# EAGLE board ATMEGA328P.(20201123)brd (EAGLE 9.6.2)
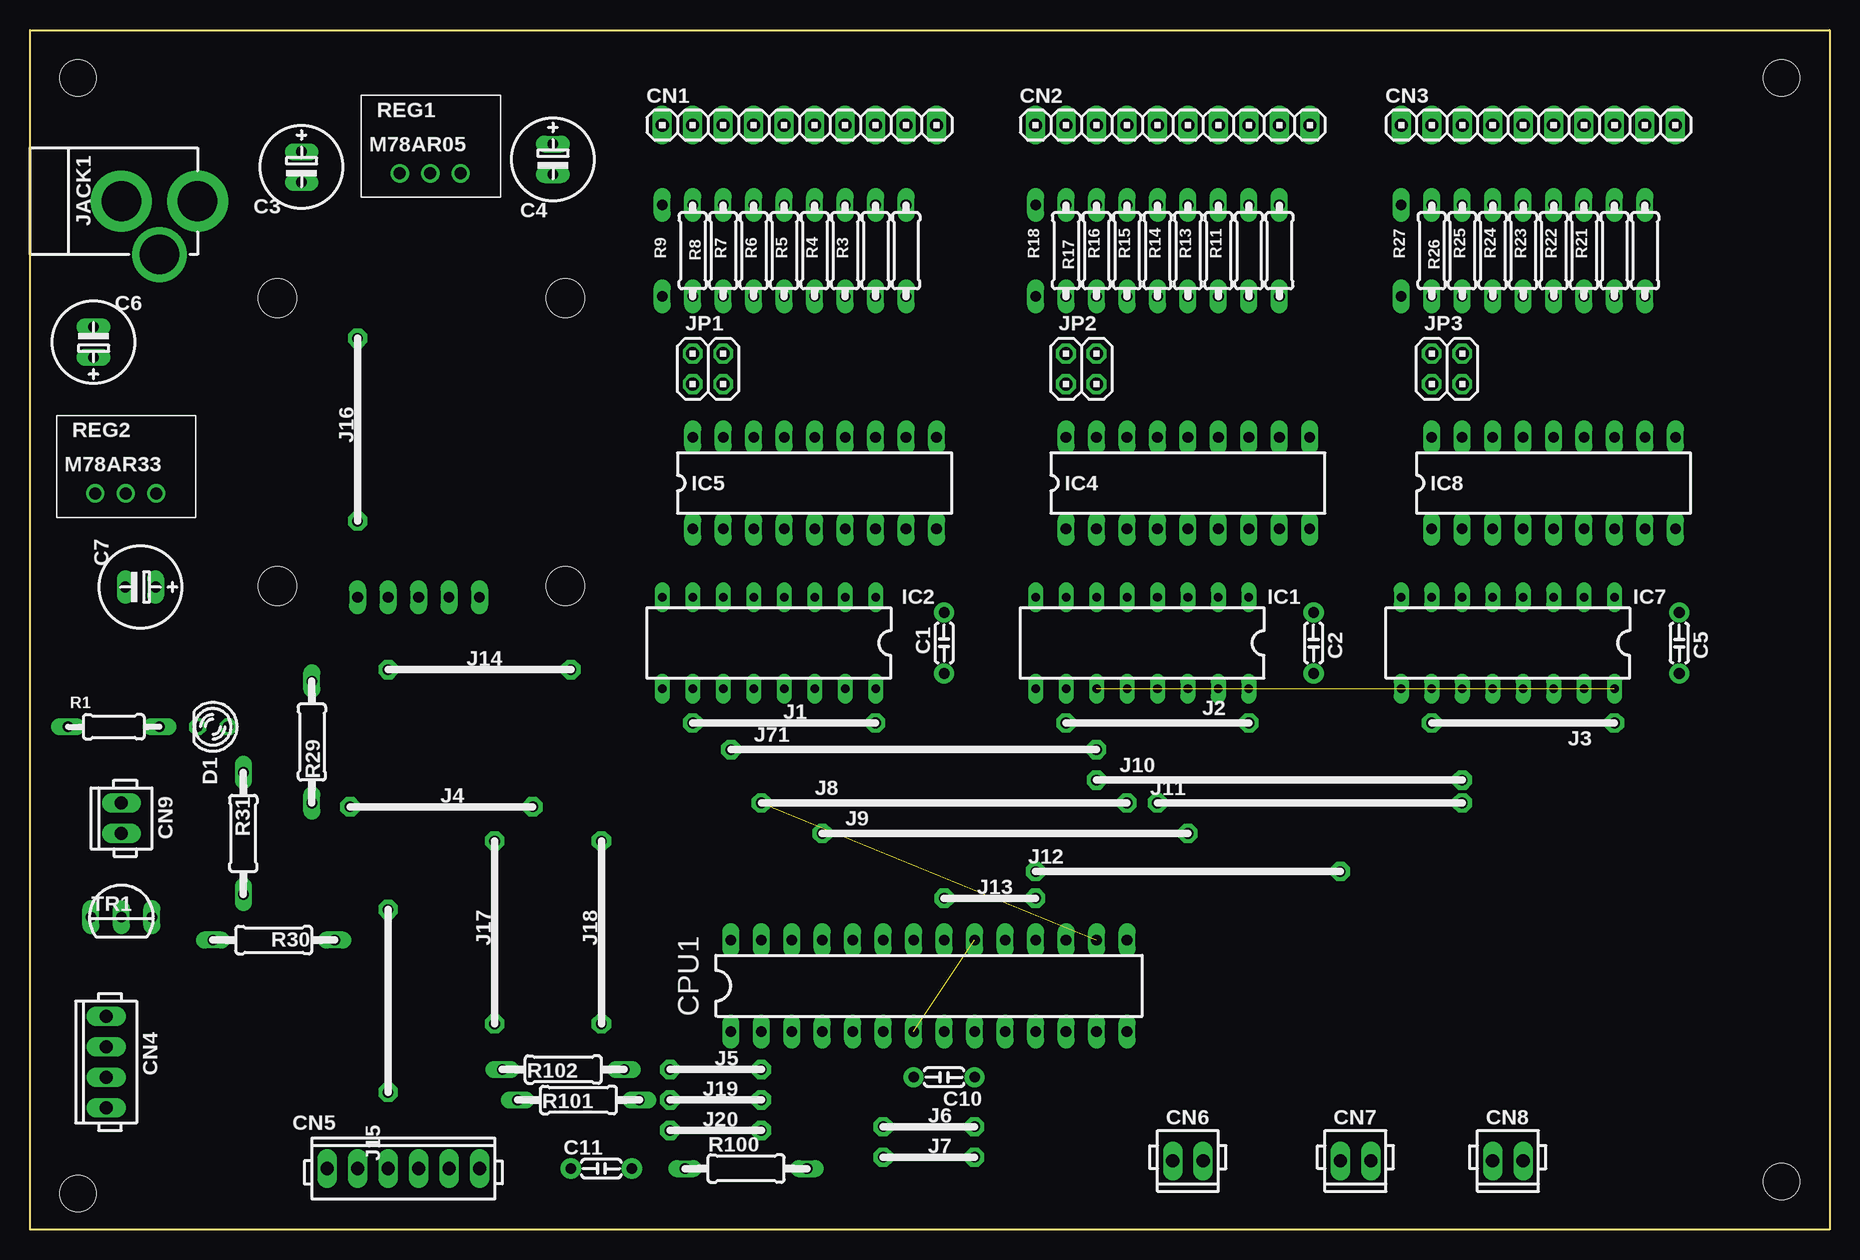
[diagram p0: board, top side]
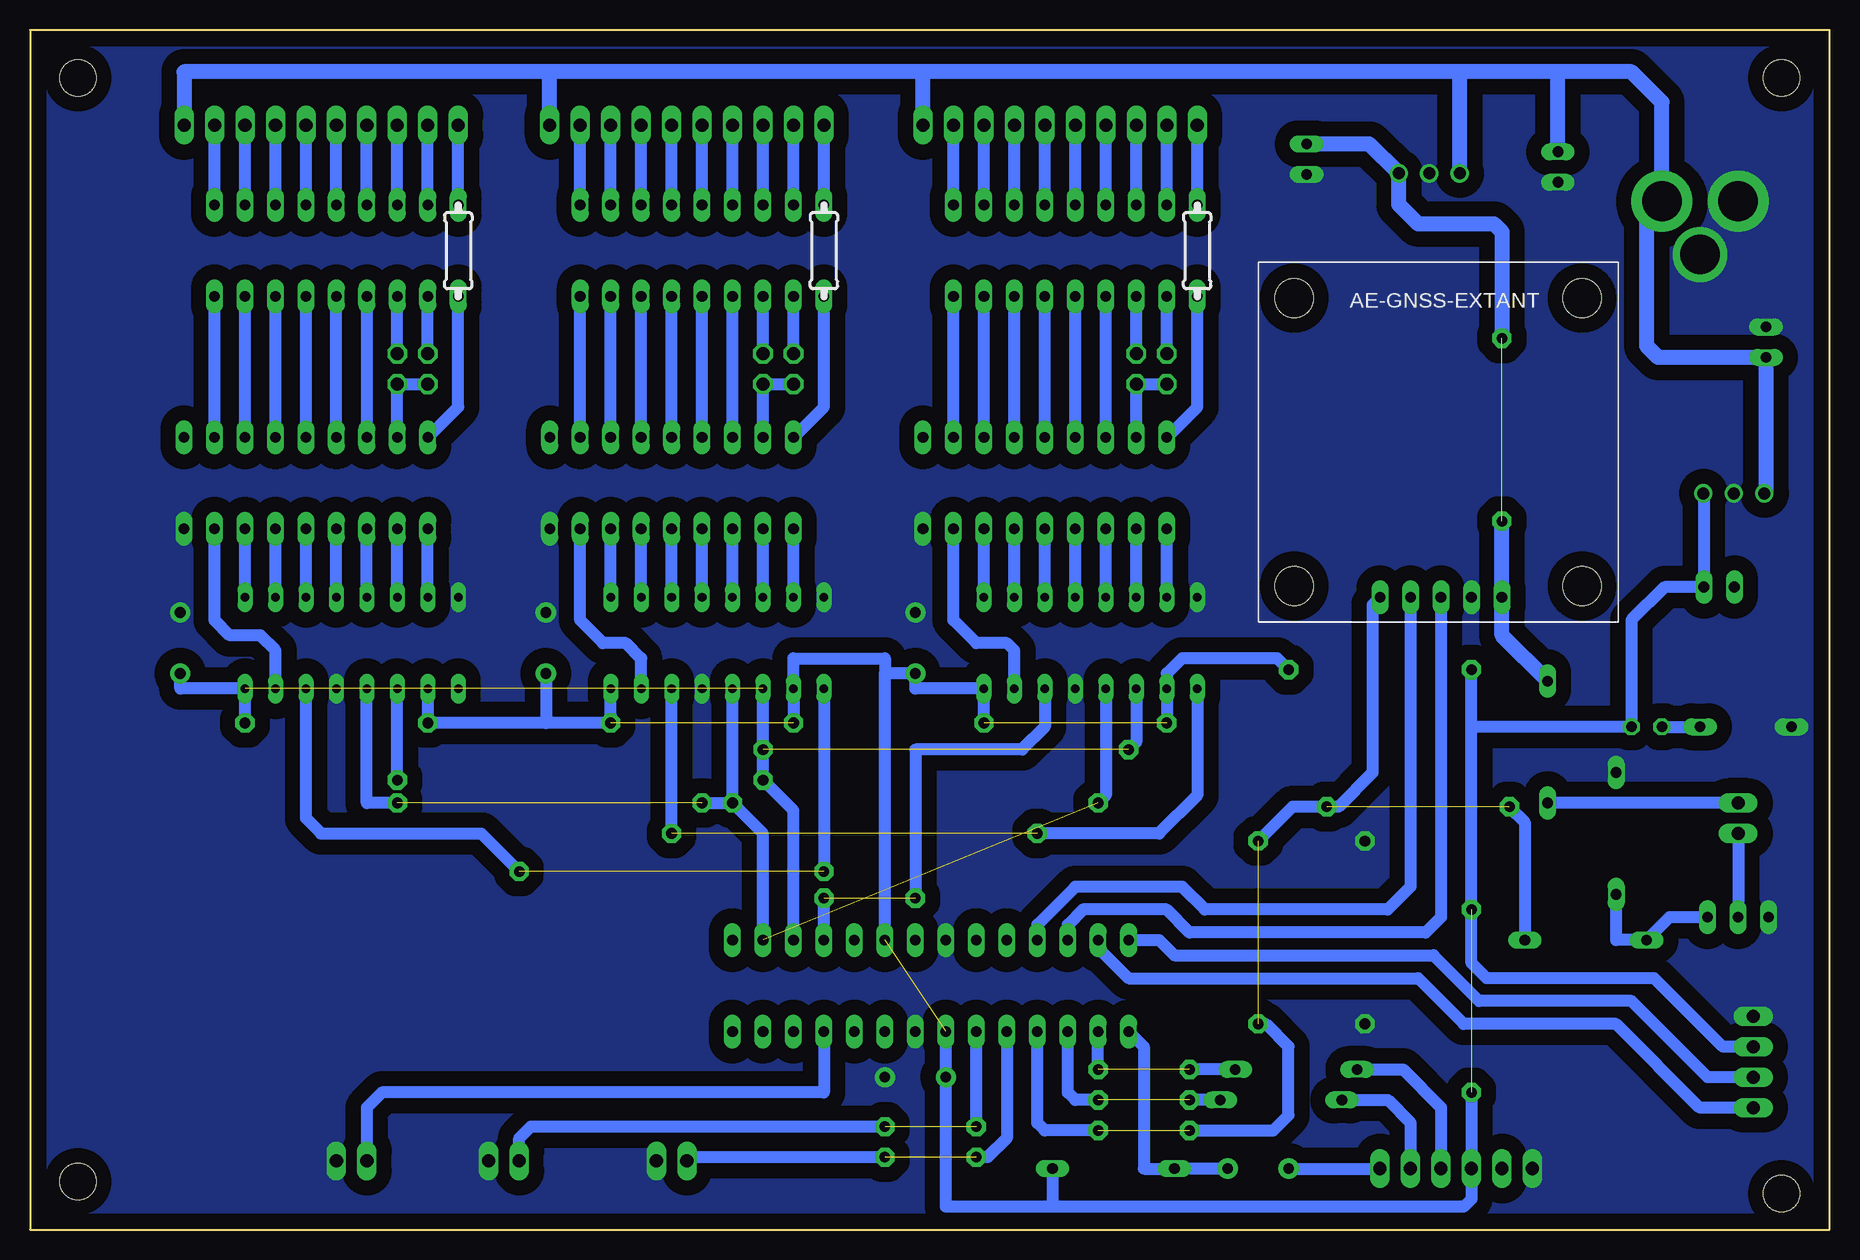
[diagram p1: board, bottom side, seen from below]

Size 150 x 100 mm. Coordinates in mm from the lower left corner, seen from the top.
Outline: 0,0 0,100 150,100 150,0 0,0
Copper layers (1*16): Top 0.035mm / dielectric 1.5mm / Bottom 0.035mm
Design rules "SeeedStudio_2layer_DRU_no_angle_20140221": minimum track width 6mil, minimum drill 12mil, track to track 6mil, track to pad 6mil, pad to pad 6mil, via to via 6mil, smd to smd 0mil, copper to edge 10mil, drill to drill 10mil, minimum pad ring 10mil, minimum via ring 6mil, stop-mask expansion 2mil, vias tented up to drill 100mil, thermal gap 10mil
Holes 3 mm at 4,96 146,96 146,4 4,3

## Footprints (pad centres in the part's own frame; a part is rotated, then mirrored left to right if it is on the bottom)
C5B3 = drill 0.889 pad 1.676: 1 -2.54,0; 2 2.54,0
E2,5-7 = drill 0.889 long: + -1.27,0; - 1.27,0
1X10 = drill 1.092 long: 1 -11.43,0; 2 -8.89,0; 3 -6.35,0; 4 -3.81,0; 5 -1.27,0; 6 1.27,0; 7 3.81,0; 8 6.35,0; 9 8.89,0; 10 11.43,0
4P-S = drill 1.092 long: 1 -3.81,0; 2 -1.27,0; 3 1.27,0; 4 3.81,0
6P-S = drill 1.092 long: 1 -6.35,0; 2 -3.81,0; 3 -1.27,0; 4 1.27,0; 5 3.81,0; 6 6.35,0
2P-S = drill 1.092 long: 1 -1.27,0; 2 1.27,0
DIL28-3 = drill 0.889 long: 1 -16.51,-3.81; 2 -13.97,-3.81; 3 -11.43,-3.81; 4 -8.89,-3.81; 5 -6.35,-3.81; 6 -3.81,-3.81; 7 -1.27,-3.81; 8 1.27,-3.81; 9 3.81,-3.81; 10 6.35,-3.81; 11 8.89,-3.81; 12 11.43,-3.81; 13 13.97,-3.81; 14 16.51,-3.81; 15 16.51,3.81; 16 13.97,3.81; 17 11.43,3.81; 18 8.89,3.81; 19 6.35,3.81; 20 3.81,3.81; 21 1.27,3.81; 22 -1.27,3.81; 23 -3.81,3.81; 24 -6.35,3.81; 25 -8.89,3.81; 26 -11.43,3.81; 27 -13.97,3.81; 28 -16.51,3.81
LED3MM = drill 0.889 octagon: A -1.27,0; K 1.27,0
AE-GNSS-EXTANT = drill 0.9 long: 1PPS 27.94,10.16; GND 27.94,17.78; RXD 27.94,12.7; TXD 27.94,15.24; VCC 27.94,20.32 | hole 3.2: 27,3; 27,27; 3,27; 3,3
DIL16 = drill 0.711 pad 1.27 long: 1 -8.89,-3.81; 2 -6.35,-3.81; 3 -3.81,-3.81; 4 -1.27,-3.81; 5 1.27,-3.81; 6 3.81,-3.81; 7 6.35,-3.81; 8 8.89,-3.81; 9 8.89,3.81; 10 6.35,3.81; 11 3.81,3.81; 12 1.27,3.81; 13 -1.27,3.81; 14 -3.81,3.81; 15 -6.35,3.81; 16 -8.89,3.81
DIL18 = drill 0.889 long: 1 -10.16,-3.81; 2 -7.62,-3.81; 3 -5.08,-3.81; 4 -2.54,-3.81; 5 0,-3.81; 6 2.54,-3.81; 7 5.08,-3.81; 8 7.62,-3.81; 9 10.16,-3.81; 10 10.16,3.81; 11 7.62,3.81; 12 5.08,3.81; 13 2.54,3.81; 14 0,3.81; 15 -2.54,3.81; 16 -5.08,3.81; 17 -7.62,3.81; 18 -10.16,3.81
15 = drill 0.889 pad 1.6 octagon: 1 -7.62,0; 2 7.62,0
07 = drill 0.889 pad 1.6 octagon: 1 -3.81,0; 2 3.81,0
30 = drill 0.889 pad 1.6 octagon: 1 -15.24,0; 2 15.24,0
25 = drill 0.889 pad 1.6 octagon: 1 -12.7,0; 2 12.7,0
DC15L = drill 3.302 pad 5.08: 1 0,0; 2 0,-6.35 | drill 3.302 pad 4.572: 3 4.445,-3.175
2X02 = drill 1.092 octagon: 1 -1.27,-1.27; 2 -1.27,1.27; 3 1.27,-1.27; 4 1.27,1.27
0204/7 = drill 0.889 long: 1 -3.81,0; 2 3.81,0
0207/7 = drill 0.889 long: 1 -3.81,0; 2 3.81,0
0207/10 = drill 0.889 long: 1 -5.08,0; 2 5.08,0
RE7805 = drill 1: GND 2.575,0.095; VIN 0.035,0.095; VOUT 5.115,0.095
TO92-LINE = drill 0.889 long: 1 2.54,0; 2 0,0; 3 -2.54,0

## Placement (x,y rotation side)
C1  0.1u  [C5B3]  76.2,48.9 90 top
C2  0.1u  [C5B3]  107,48.9 270 top
C3  100u  [E2,5-7]  22.64,88.58 270 top
C4  100u  [E2,5-7]  43.59,89.22 270 top
C5  0.1u  [C5B3]  137.48,48.9 270 top
C6  100u  [E2,5-7]  5.3,73.98 90 top
C7  100u  [E2,5-7]  9.21,53.56 180 top
C10  0.1u  [C5B3]  76.2,12.7 180 top
C11  [C5B3]  47.62,5.08 0 top
CN1  SEG_1  [1X10]  64.14,92.08 0 top
CN2  SEG_2  [1X10]  95.25,92.08 0 top
CN3  SEG_3  [1X10]  125.73,92.08 0 top
CN4  To I2C Device  [4P-S]  6.35,13.97 270 top
CN5  [6P-S]  31.11,5.08 180 top
CN6  SW1  [2P-S]  96.52,5.71 0 top
CN7  SW2  [2P-S]  110.49,5.71 0 top
CN8  SW3  [2P-S]  123.19,5.71 0 top
CN9  1PPS  [2P-S]  7.62,34.29 270 top
CPU1  ATMEGA328P  [DIL28-3]  74.93,20.32 0 top
D1  [LED3MM]  15.24,41.91 180 top
GPS1  [AE-GNSS-EXTANT]  47.62,80.64 270 bottom
IC1  74HC595  [DIL16]  92.71,48.9 180 top
IC2  74HC595  [DIL16]  61.59,48.9 180 top
IC4  TBD62083  [DIL18]  96.52,62.23 0 top
IC5  TBD62083  [DIL18]  65.41,62.23 0 top
IC7  74HC595  [DIL16]  123.19,48.9 180 top
IC8  TBD62083  [DIL18]  127,62.23 0 top
J1  [15]  62.87,42.23 180 top
J2  [15]  93.98,42.23 180 top
J3  [15]  124.46,42.23 180 top
J4  [15]  34.29,35.24 180 top
J5  [07]  57.15,13.34 180 top
J6  [07]  74.93,8.57 180 top
J7  [07]  74.93,6.03 180 top
J8  [30]  76.2,35.56 0 top
J9  [30]  81.28,33.02 0 top
J10  [30]  104.14,37.47 0 top
J11  [25]  106.68,35.56 0 top
J12  [25]  96.52,29.84 0 top
J13  [07]  80.01,27.62 180 top
J14  [15]  37.47,46.67 180 top
J15  [15]  29.84,19.05 90 top
J16  [15]  27.3,66.67 270 top
J17  [15]  38.73,24.77 270 top
J18  [15]  47.62,24.77 270 top
J19  [07]  57.15,10.79 180 top
J20  [07]  57.15,8.26 180 top
J71  [30]  73.66,40.01 0 top
JACK1  [DC15L]  13.97,85.72 270 top
JP1  [2X02]  56.52,71.75 0 top
JP2  [2X02]  87.63,71.75 0 top
JP3  [2X02]  118.11,71.75 0 top
R1  1k  [0204/7]  6.99,41.91 180 top
R2  430  [0207/7]  70.48,81.6 90 top
R3  1k  [0207/7]  67.94,81.6 90 top
R4  1k  [0207/7]  65.41,81.6 90 top
R5  1k  [0207/7]  62.87,81.6 90 top
R6  1k  [0207/7]  60.33,81.6 90 top
R7  1k  [0207/7]  57.78,81.6 90 top
R8  1k  [0207/7]  55.24,81.6 90 top
R9  1k  [0207/7]  52.7,81.6 90 bottom
R10  430  [0207/7]  101.6,81.6 90 top
R11  1k  [0207/7]  99.06,81.6 90 top
R12  430  [0207/7]  73.03,81.6 90 top
R13  1k  [0207/7]  96.52,81.6 90 top
R14  1k  [0207/7]  93.98,81.6 90 top
R15  1k  [0207/7]  91.44,81.6 90 top
R16  1k  [0207/7]  88.9,81.6 90 top
R17  1k  [0207/7]  86.36,81.6 90 top
R18  1k  [0207/7]  83.82,81.6 90 bottom
R19  430  [0207/7]  104.14,81.6 90 top
R20  430  [0207/7]  132.08,81.6 90 top
R21  1k  [0207/7]  129.54,81.6 90 top
R22  1k  [0207/7]  127,81.6 90 top
R23  1k  [0207/7]  124.46,81.6 90 top
R24  1k  [0207/7]  121.92,81.6 90 top
R25  1k  [0207/7]  119.38,81.6 90 top
R26  1k  [0207/7]  116.84,81.6 90 top
R27  1k  [0207/7]  114.3,81.6 90 bottom
R28  430  [0207/7]  134.62,81.6 90 top
R29  1k  [0207/10]  23.5,40.64 90 top
R30  1k  [0207/10]  20.32,24.13 180 top
R31  10k  [0207/10]  17.78,33.02 270 top
R100  10k  [0207/10]  59.69,5.08 0 top
R101  1k  [0207/10]  45.72,10.79 0 top
R102  1k  [0207/10]  44.45,13.34 0 top
REG1  M78AR05  [RE7805]  30.8,87.95 0 top
REG2  M78AR33  [RE7805]  5.4,61.28 0 top
TR1  2SC1815  [TO92-LINE]  7.62,26.04 0 top

## Library data of the parts
C1 C2 C5 C10 C11 = 1-cr
C3 C4 C6 C7 R1-R31 R100-R102 TR1 = akihabara
CN1-CN3 JP1-JP3 = pinhead
CN4-CN9 = 1-conn-jst
CPU1 IC4 IC5 IC8 = microchip
D1 IC1 IC2 IC7 = MyLib
GPS1 = akiduki
J1-J20 J71 = 1-jumper
JACK1 = 1-conn
REG1 REG2 = MCR_parts

## Nets
1PPS [Signal]: CPU1.4 GPS1.1PPS J4.1 J4.2 J18.1 J18.2 J20.1 J20.2 R30.1
+3.3V [VCC]: C1.1 C2.2 C5.2 C7.+ C10.2 CN4.2 CN5.4 CPU1.7 CPU1.20 D1.A IC1.10 IC1.16 IC2.10 IC2.16 IC7.10 IC7.16 J1.1 J1.2 J2.1 J2.2 J3.1 J3.2 J14.1 J14.2 J15.1 J15.2 R100.2 REG2.VOUT
+5V [VCC]: C4.+ GPS1.VCC J16.1 J16.2 R29.2 REG1.VOUT
+VIN [VCC]: C3.+ C6.+ CN1.10 CN2.10 CN3.10 JACK1.1 REG1.VIN REG2.VIN
A4/SDA [Signal]: CN4.4 CPU1.27
A5/SCL [Signal]: CN4.3 CPU1.28
COM_SEG1_IN [Signal]: IC1.2 IC4.6
COM_SEG1_IN1 [Signal]: IC7.2 IC8.6
COM_SEG2_IN [Signal]: IC1.1 IC4.7
COM_SEG2_IN1 [Signal]: IC7.1 IC8.7
COM_SEG3_IN [Signal]: IC1.15 IC4.8
COM_SEG3_IN1 [Signal]: IC7.15 IC8.8
CTS [Signal]: C11.1 CN5.1
D1_A [Signal]: D1.K R1.1
GND [GND]: C1.2 C2.1 C3.- C4.- C5.1 C6.- C10.1 CN4.1 CN5.6 CN6.2 CN7.2 CN8.2 CPU1.8 CPU1.22 GPS1.GND IC1.8 IC1.13 IC2.8 IC2.13 IC4.9 IC5.9 IC7.8 IC7.13 IC8.9 J17.1 J17.2 JACK1.2 JACK1.3 R1.2 R31.1 REG1.GND REG2.GND TR1.3
GPS_RXD [Signal]: CPU1.25 GPS1.RXD
GPS_TXD [Signal]: CPU1.26 GPS1.TXD
IN_SEG_A [Signal]: IC2.5 IC5.3
IN_SEG_B [Signal]: IC2.7 IC5.1
IN_SEG_C [Signal]: IC2.4 IC5.4
IN_SEG_D [Signal]: IC2.2 IC5.6
IN_SEG_DP [Signal]: IC2.15 IC5.8
IN_SEG_E [Signal]: IC2.1 IC5.7
IN_SEG_F [Signal]: IC2.3 IC5.5
IN_SEG_G [Signal]: IC2.6 IC5.2
OUT_LED_A [Signal]: CN9.1 R29.1
OUT_LED_K [Signal]: CN9.2 TR1.2
OUT_SEG1__DP [Signal]: IC5.17 JP1.1 JP1.3
OUT_SEG1_A [Signal]: IC5.13 R3.1
OUT_SEG1_B [Signal]: IC5.14 R4.1
OUT_SEG1_C [Signal]: IC5.18 R9.1
OUT_SEG1_D [Signal]: IC5.16 R6.1
OUT_SEG1_E [Signal]: IC5.15 R5.1
OUT_SEG1_F [Signal]: IC5.11 R12.1
OUT_SEG1_G [Signal]: IC5.12 R2.1
OUT_SEG2_A [Signal]: IC4.13 R11.1
OUT_SEG2_B [Signal]: IC4.14 R13.1
OUT_SEG2_C [Signal]: IC4.18 R18.1
OUT_SEG2_D [Signal]: IC4.16 R15.1
OUT_SEG2_DP [Signal]: IC4.17 JP2.1 JP2.3
OUT_SEG2_DP1 [Signal]: JP2.2 R17.1
OUT_SEG2_DP2 [Signal]: JP2.4 R16.1
OUT_SEG2_E [Signal]: IC4.15 R14.1
OUT_SEG2_F [Signal]: IC4.11 R19.1
OUT_SEG2_G [Signal]: IC4.12 R10.1
OUT_SEG3_A [Signal]: IC8.13 R21.1
OUT_SEG3_B [Signal]: IC8.14 R22.1
OUT_SEG3_C [Signal]: IC8.18 R27.1
OUT_SEG3_D [Signal]: IC8.16 R24.1
OUT_SEG3_DP [Signal]: IC8.17 JP3.1 JP3.3
OUT_SEG3_DP1 [Signal]: JP3.2 R26.1
OUT_SEG3_DP2 [Signal]: JP3.4 R25.1
OUT_SEG3_E [Signal]: IC8.15 R23.1
OUT_SEG3_F [Signal]: IC8.11 R28.1
OUT_SEG3_G [Signal]: IC8.12 R20.1
OUT_SEG_DP1 [Signal]: JP1.2 R8.1
OUT_SEG_DP2 [Signal]: JP1.4 R7.1
QH1->SER [Signal]: IC1.14 IC2.9 J9.1 J9.2
QH2-SER [Signal]: IC1.9 IC7.14 J12.1 J12.2
RCLK [Signal]: CPU1.16 IC1.12 IC2.12 IC7.12 J8.1 J8.2 J11.1 J11.2
RST [Signal]: C11.2 CPU1.1 R100.1
RXD [Signal]: CPU1.2 J5.1 J5.2 R102.2
RXD<-TXD [Signal]: CN5.2 R101.1
S$1 [Signal]: CPU1.23
SCLK [Signal]: CPU1.17 IC1.11 IC2.11 IC7.11 J10.1 J10.2 J71.1 J71.2
SEG1_A [Signal]: CN1.7 R3.2
SEG1_B [Signal]: CN1.6 R4.2
SEG1_C [Signal]: CN1.1 R9.2
SEG1_D [Signal]: CN1.4 R6.2
SEG1_DP1 [Signal]: CN1.2 R8.2
SEG1_DP2 [Signal]: CN1.3 R7.2
SEG1_E [Signal]: CN1.5 R5.2
SEG1_F [Signal]: CN1.9 R12.2
SEG1_G [Signal]: CN1.8 R2.2
SEG2_A [Signal]: CN2.7 R11.2
SEG2_B [Signal]: CN2.6 R13.2
SEG2_C [Signal]: CN2.1 R18.2
SEG2_D [Signal]: CN2.4 R15.2
SEG2_DP1 [Signal]: CN2.2 R17.2
SEG2_DP2 [Signal]: CN2.3 R16.2
SEG2_E [Signal]: CN2.5 R14.2
SEG2_F [Signal]: CN2.9 R19.2
SEG2_G [Signal]: CN2.8 R10.2
SEG3_A [Signal]: CN3.7 R21.2
SEG3_B [Signal]: CN3.6 R22.2
SEG3_C [Signal]: CN3.1 R27.2
SEG3_D [Signal]: CN3.4 R24.2
SEG3_DP1 [Signal]: CN3.2 R26.2
SEG3_DP2 [Signal]: CN3.3 R25.2
SEG3_E [Signal]: CN3.5 R23.2
SEG3_F [Signal]: CN3.9 R28.2
SEG3_G [Signal]: CN3.8 R20.2
SEG_F_IN [Signal]: IC1.3 IC4.5
SEG_F_IN1 [Signal]: IC7.3 IC8.5
SER/D12 [Signal]: CPU1.18 IC2.14 J13.1 J13.2
SW1/D2 [Signal]: CN6.1 CPU1.5 J7.1 J7.2
SW2/D3 [Signal]: CN7.1 CPU1.6 J6.1 J6.2
SW3/D4 [Signal]: CN8.1 CPU1.11
SW4 [Signal]: CPU1.14
TR1_B [Signal]: R30.2 R31.2 TR1.1
TR2_IN [Signal]: IC1.4 IC4.4
TR2_IN1 [Signal]: IC7.4 IC8.4
TR3_IN [Signal]: IC1.5 IC4.3
TR3_IN1 [Signal]: IC7.5 IC8.3
TR5_IN [Signal]: IC1.7 IC4.1
TR5_IN1 [Signal]: IC7.7 IC8.1
TR４_IN [Signal]: IC1.6 IC4.2
TR４_IN1 [Signal]: IC7.6 IC8.2
TXD [Signal]: CPU1.3 J19.1 J19.2 R101.2
TXD->RXD [Signal]: CN5.3 R102.1

## Tracks (layer width: path | path; a pad name or v marks a point on that pad's centre or on a via)
1PPS  (3 unrouted)
  Bottom 1.016: J4.2 25.4,33.97 R30.1 | J20.1 65.41,8.26 66.04,8.89 CPU1.4 | J20.2 46.35,8.26 45.09,9.53 45.09,15.24 46.99,17.14 J18.2 | GPS1.1PPS 38.1,52.07 38.1,38.1 40.96,35.24 J4.1 44.77,35.24 J18.1
+3.3V  (5 unrouted)
  Bottom 1.016: REG2.VOUT 10.48,61.34 C7.+ 13.75,53.56 16.51,50.8 D1.A 29.84,41.91 | CPU1.7 C10.2 73.66,1.91 64.77,1.91 | J15.1 CN5.4 29.84,2.54 30.48,1.91 64.77,1.91 | 29.84,41.91 J15.2 29.84,22.23 28.57,20.95 14.61,20.95 8.89,15.24 CN4.2 | 29.84,41.91 J14.2 | R100.2 64.77,1.91 | C5.2 137.48,45.09 IC7.16 J3.1 | IC7.10 J3.2 107,42.23 | C2.2 107,42.23 | J2.1 IC1.16 | J2.1 101.6,42.86 | J2.1 107,42.23 | J2.2 IC1.10 86.36,47.62 78.74,47.62 78.74,46.35 | CPU1.20 78.74,46.35 | 78.74,46.35 C1.1 76.2,45.09 IC2.16 J1.1 | J1.2 IC2.10 55.24,46.35 53.98,47.62 46.04,47.62 J14.1
+5V  (1 unrouted)
  Bottom 1.27: C4.+ 38.36,90.49 REG1.VOUT 35.91,85.44 34.29,83.82 27.94,83.82 27.3,83.19 J16.1 | R29.2 27.3,49.53 GPS1.VCC J16.2
+VIN
  Bottom 1.27: 22.86,96.52 16.51,96.52 13.97,93.98 JACK1.1 15.24,84.45 15.24,73.66 14.29,72.71 C6.+ 5.3,61.5 REG2.VIN | 22.86,96.52 30.48,96.52 | 30.48,96.52 75.56,96.52 | 75.56,96.52 106.68,96.52 | 106.68,96.52 137.16,96.52 CN3.10 137.16,91.44 | CN2.10 106.68,96.52 | CN1.10 75.56,96.52 | REG1.VIN 30.83,96.17 30.48,96.52 | C3.+ 22.64,96.3 22.86,96.52
A4/SDA
  Bottom 1.016: CPU1.27 60.96,23.5 58.42,20.95 34.29,20.95 30.48,17.14 17.78,17.14 10.79,10.16 CN4.4
A5/SCL
  Bottom 1.016: CPU1.28 55.88,24.13 54.61,22.86 33.02,22.86 29.21,19.05 16.51,19.05 10.16,12.7 CN4.3 6.99,12.7
COM_SEG1_IN
  Bottom 1.016: IC1.2 IC4.6
COM_SEG1_IN1
  Bottom 1.016: IC7.2 IC8.6
COM_SEG2_IN
  Bottom 1.016: IC1.1 IC4.7
COM_SEG2_IN1
  Bottom 1.016: IC7.1 IC8.7
COM_SEG3_IN
  Bottom 1.016: IC1.15 99.06,47.62 100.33,48.9 102.23,48.9 104.14,50.8 IC4.8
COM_SEG3_IN1
  Bottom 1.016: IC7.15 129.54,48.26 130.81,49.53 133.35,49.53 134.62,50.8 IC8.8
CTS
  Bottom 1.016: C11.1 CN5.1
D1_A
  Bottom 1.016: D1.K R1.1
GND
  pour Bottom (isolate 1.27, no thermals): -1.27,101.47 151.13,101.47 151.13,-1.27 -1.27,-1.27
GPS_RXD
  Bottom 1.016: CPU1.25 66.04,25.4 62.87,28.57 53.98,28.57 52.07,26.67 36.83,26.67 34.92,28.57 GPS1.RXD
GPS_TXD
  Bottom 1.016: CPU1.26 63.5,25.4 62.23,26.67 55.24,26.67 53.34,24.77 33.66,24.77 32.38,26.04 GPS1.TXD
IN_SEG_A
  Bottom 1.016: IC2.5 IC5.3
IN_SEG_B
  Bottom 1.016: IC2.7 IC5.1
IN_SEG_C
  Bottom 1.016: IC2.4 IC5.4
IN_SEG_D
  Bottom 1.016: IC2.2 IC5.6
IN_SEG_DP
  Bottom 1.016: IC2.15 67.94,48.26 68.58,48.9 71.12,48.9 73.03,50.8 IC5.8
IN_SEG_E
  Bottom 1.016: IC2.1 IC5.7
IN_SEG_F
  Bottom 1.016: IC2.3 IC5.5
IN_SEG_G
  Bottom 1.016: IC2.6 IC5.2
OUT_LED_A
  Bottom 1.016: CN9.1 R29.1
OUT_LED_K
  Bottom 1.016: CN9.2 TR1.2
OUT_SEG1__DP
  Bottom 1.016: IC5.17 JP1.3 JP1.1
OUT_SEG1_A
  Bottom 1.016: IC5.13 R3.1
OUT_SEG1_B
  Bottom 1.016: IC5.14 R4.1
OUT_SEG1_C
  Bottom 1.016: IC5.18 52.7,68.58 R9.1
OUT_SEG1_D
  Bottom 1.016: IC5.16 R6.1
OUT_SEG1_E
  Bottom 1.016: IC5.15 R5.1
OUT_SEG1_F
  Bottom 1.016: IC5.11 R12.1
OUT_SEG1_G
  Bottom 1.016: IC5.12 R2.1
OUT_SEG2_A
  Bottom 1.016: IC4.13 R11.1
OUT_SEG2_B
  Bottom 1.016: IC4.14 R13.1
OUT_SEG2_C
  Bottom 1.016: IC4.18 83.82,68.58 R18.1
OUT_SEG2_D
  Bottom 1.016: IC4.16 R15.1
OUT_SEG2_DP
  Bottom 1.016: IC4.17 JP2.3 JP2.1
OUT_SEG2_DP1
  Bottom 1.016: JP2.2 R17.1
OUT_SEG2_DP2
  Bottom 1.016: JP2.4 R16.1
OUT_SEG2_E
  Bottom 1.016: IC4.15 R14.1
OUT_SEG2_F
  Bottom 1.016: IC4.11 R19.1
OUT_SEG2_G
  Bottom 1.016: IC4.12 R10.1
OUT_SEG3_A
  Bottom 1.016: IC8.13 R21.1
OUT_SEG3_B
  Bottom 1.016: IC8.14 R22.1
OUT_SEG3_C
  Bottom 1.016: IC8.18 114.3,68.58 R27.1
OUT_SEG3_D
  Bottom 1.016: R24.1 IC8.16
OUT_SEG3_DP
  Bottom 1.016: IC8.17 JP3.3 JP3.1
OUT_SEG3_DP1
  Bottom 1.016: JP3.2 R26.1
OUT_SEG3_DP2
  Bottom 1.016: JP3.4 R25.1
OUT_SEG3_E
  Bottom 1.016: IC8.15 R23.1
OUT_SEG3_F
  Bottom 1.016: IC8.11 R28.1
OUT_SEG3_G
  Bottom 1.016: IC8.12 R20.1
OUT_SEG_DP1
  Bottom 1.016: JP1.2 R8.1
OUT_SEG_DP2
  Bottom 1.016: JP1.4 R7.1
QH1->SER  (1 unrouted)
  Bottom 1.016: IC2.9 52.7,36.2 55.88,33.02 J9.1 | J9.2 IC1.14
QH2-SER  (1 unrouted)
  Bottom 1.016: IC1.9 J12.1 | J12.2 112.39,33.02 125.73,33.02 127,34.29 IC7.14
RCLK  (2 unrouted)
  Bottom 1.016: J11.1 J8.2 | J8.2 IC1.12 | IC2.12 60.33,36.2 J8.1 | J11.2 121.92,35.56 IC7.12 | CPU1.16 88.9,33.02 J8.2
RST
  Bottom 1.016: CPU1.1 57.15,15.24 57.15,5.08 R100.1 C11.2
RXD  (1 unrouted)
  Bottom 1.016: R102.2 J5.2 | J5.1 CPU1.2
RXD<-TXD
  Bottom 1.016: R101.1 36.83,10.79 34.92,8.89 CN5.2
SCLK  (2 unrouted)
  Bottom 1.016: IC1.11 J71.2 J10.1 86.36,34.92 CPU1.17 | IC2.11 57.78,40.64 J71.1 | J10.2 IC7.11
SEG1_A
  Bottom 1.016: R3.2 CN1.7
SEG1_B
  Bottom 1.016: R4.2 CN1.6
SEG1_C
  Bottom 1.016: R9.2 CN1.1
SEG1_D
  Bottom 1.016: R6.2 CN1.4
SEG1_DP1
  Bottom 1.016: R8.2 CN1.2
SEG1_DP2
  Bottom 1.016: R7.2 CN1.3
SEG1_E
  Bottom 1.016: R5.2 CN1.5
SEG1_F
  Bottom 1.016: R12.2 CN1.9
SEG1_G
  Bottom 1.016: R2.2 CN1.8
SEG2_A
  Bottom 1.016: R11.2 CN2.7
SEG2_B
  Bottom 1.016: R13.2 CN2.6
SEG2_C
  Bottom 1.016: R18.2 CN2.1
SEG2_D
  Bottom 1.016: R15.2 CN2.4
SEG2_DP1
  Bottom 1.016: R17.2 CN2.2
SEG2_DP2
  Bottom 1.016: R16.2 CN2.3
SEG2_E
  Bottom 1.016: R14.2 CN2.5
SEG2_F
  Bottom 1.016: R19.2 CN2.9
SEG2_G
  Bottom 1.016: R10.2 CN2.8
SEG3_A
  Bottom 1.016: R21.2 CN3.7
SEG3_B
  Bottom 1.016: R22.2 CN3.6
SEG3_C
  Bottom 1.016: R27.2 CN3.1
SEG3_D
  Bottom 1.016: R24.2 CN3.4
SEG3_DP1
  Bottom 1.016: R26.2 CN3.2
SEG3_DP2
  Bottom 1.016: R25.2 CN3.3
SEG3_E
  Bottom 1.016: R23.2 CN3.5
SEG3_F
  Bottom 1.016: R28.2 CN3.9
SEG3_G
  Bottom 1.016: R20.2 CN3.8
SEG_F_IN
  Bottom 1.016: IC1.3 IC4.5
SEG_F_IN1
  Bottom 1.016: IC7.3 IC8.5
SER/D12  (1 unrouted)
  Bottom 1.016: CPU1.18 J13.1 | IC2.14 65.41,41.91 67.31,40.01 76.2,40.01 J13.2
SW1/D2  (1 unrouted)
  Bottom 1.016: CPU1.5 68.58,7.62 70.17,6.03 J7.2 | J7.1 94.93,6.03 CN6.1
SW2/D3  (1 unrouted)
  Bottom 1.016: J6.2 CPU1.6 | J6.1 108.27,8.57 109.22,7.62 CN7.1
SW3/D4
  Bottom 1.016: CPU1.11 83.82,11.43 120.65,11.43 121.92,10.16 CN8.1
TR1_B
  Bottom 1.016: R31.2 17.78,24.13 R30.2 13.34,26.04 TR1.1
TR2_IN
  Bottom 1.016: IC1.4 IC4.4
TR2_IN1
  Bottom 1.016: IC7.4 IC8.4
TR3_IN
  Bottom 1.016: IC1.5 IC4.3
TR3_IN1
  Bottom 1.016: IC7.5 IC8.3
TR5_IN
  Bottom 1.016: IC1.7 IC4.1
TR5_IN1
  Bottom 1.016: IC7.7 IC8.1
TR４_IN
  Bottom 1.016: IC1.6 IC4.2
TR４_IN1
  Bottom 1.016: IC7.6 IC8.2
TXD  (1 unrouted)
  Bottom 1.016: R101.2 J19.2 | J19.1 62.87,10.79 63.5,11.43 CPU1.3
TXD->RXD
  Bottom 1.016: R102.1 35.56,13.34 32.38,10.16 CN5.3